# EAGLE board shift-one (EAGLE 5.07)
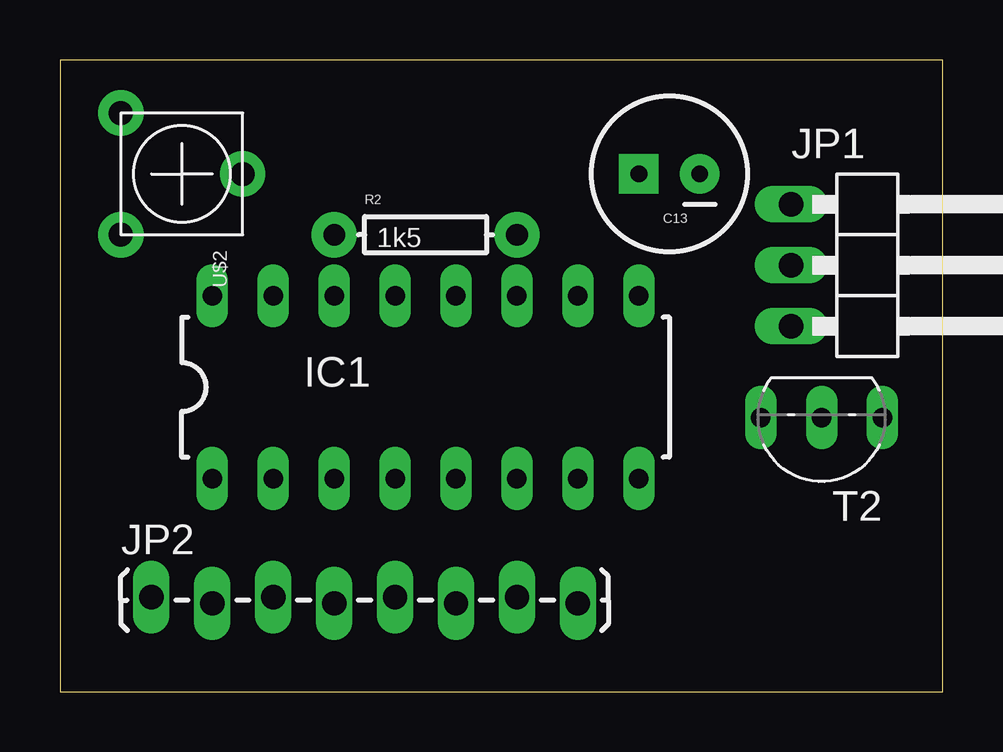
[diagram p0: board, top side]
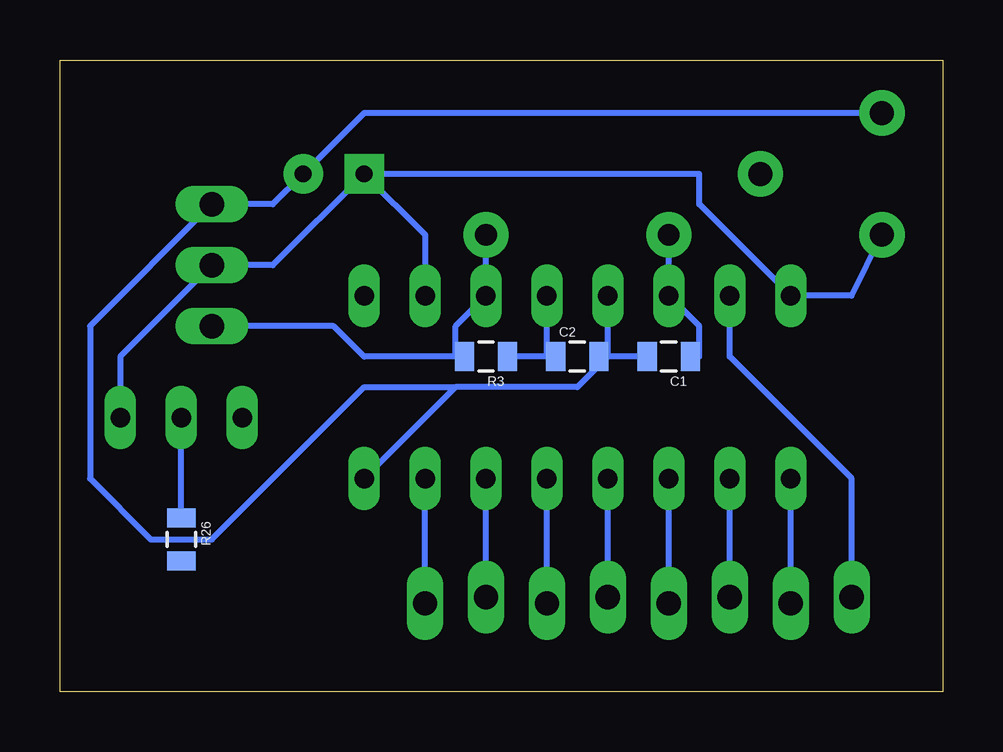
[diagram p1: board, bottom side, seen from below]

Size 36.81 x 26.34 mm. Coordinates in mm from the lower left corner, seen from the top.
Outline: 0,0 36.81,0 36.81,26.34 0,26.34 0,0
Copper layers (1*16): Top 0.035mm / dielectric 1.5mm / Bottom 0.035mm
Design rules "default": minimum track width 10mil, minimum drill 24mil, track to track 8mil, track to pad 8mil, pad to pad 8mil, via to via 8mil, smd to smd 8mil, copper to edge 40mil, drill to drill 8mil, minimum pad ring 10mil, minimum via ring 8mil, stop-mask expansion 4mil, vias tented up to drill 0mil, thermal gap 10mil

## Footprints (pad centres in the part's own frame; a part is rotated, then mirrored left to right if it is on the bottom)
0805 = smd 0.8 x 1.2: 1 -0.9,0; 2 0.9,0
CPOL-RADIAL-100UF-25V = drill 0.7 pad 1.651 square: 1 1.27,0 | drill 0.7 pad 1.651 round: 2 -1.27,0
DIL16 = drill 0.813 long: 1 -8.89,-3.81; 2 -6.35,-3.81; 3 -3.81,-3.81; 4 -1.27,-3.81; 5 1.27,-3.81; 6 3.81,-3.81; 7 6.35,-3.81; 8 8.89,-3.81; 9 8.89,3.81; 10 6.35,3.81; 11 3.81,3.81; 12 1.27,3.81; 13 -1.27,3.81; 14 -3.81,3.81; 15 -6.35,3.81; 16 -8.89,3.81
1X03/90 = drill 1.016 long: 1 -2.54,-3.81; 2 0,-3.81; 3 2.54,-3.81
1X08_LOCK_LONGPADS = drill 1.016 long: 1 0,0.127; 2 2.54,-0.127; 3 5.08,0.127; 4 7.62,-0.127; 5 10.16,0.127; 6 12.7,-0.127; 7 15.24,0.127; 8 17.78,-0.127
AXIAL-0.3 = drill 0.9 pad 1.88 round: P$1 -3.81,0; P$2 3.81,0
TO92-EBC = drill 0.813 long: B 0,-1.27; C 2.54,-1.27; E -2.54,-1.27
TRIM_POT_PTH = drill 1 pad 1.88 round: 1 -2.54,-2.54; 2 0,2.54; 3 2.54,-2.54

## Placement (x,y rotation side)
C1  222  [0805]  11.43,13.97 180 bottom
C2  222  [0805]  15.24,13.97 0 bottom
C13  10u  [CPOL-RADIAL-100UF-25V]  25.4,21.59 180 top
IC1  74LS595N  [DIL16]  15.24,12.7 0 top
JP1  [1X03/90]  34.29,17.78 270 top
JP2  [1X08_LOCK_LONGPADS]  3.81,3.81 0 top
R2  1k5  [AXIAL-0.3]  15.24,19.05 0 top
R3  33k  [0805]  19.05,13.97 180 bottom
R26  1k  [0805]  31.75,6.35 270 bottom
T2  8550  [TO92-EBC]  31.75,10.16 180 top
U$2  10k  [TRIM_POT_PTH]  5.08,21.59 270 top

## Library data of the parts
C1 C2 R2 R3 R26 T2 = digital-toy
C13 IC1 JP2 U$2 = SparkFun
JP1 = pinhead

## Nets
GND: C1.2 C2.2 C13.2 IC1.8 IC1.13 JP1.1 U$2.1
N$1: IC1.15 JP2.1
N$2: IC1.1 JP2.2
N$3: IC1.2 JP2.3
N$4: IC1.3 JP2.4
N$5: IC1.4 JP2.5
N$6: IC1.5 JP2.6
N$7: IC1.6 JP2.7
N$8: IC1.7 JP2.8
N$9: IC1.11 JP1.3 R2.P$2 R3.2
N$10: C2.1 IC1.12 R3.1
N$11: C1.1 IC1.14 R2.P$1
N$55: R26.1 T2.B
VCC: C13.1 IC1.10 IC1.16 JP1.2 T2.E U$2.3

## Tracks (layer width: path | path; a pad name or v marks a point on that pad's centre or on a via)
GND
  Bottom 0.254: C1.2 13.97,13.97 | 13.97,13.97 IC1.13 | 20.32,12.7 IC1.8 | 20.32,12.7 15.24,12.7 13.97,13.97 | 13.97,13.97 C2.2 | U$2.1 24.13,24.13 C13.2 27.94,20.32 JP1.1 35.56,15.24 35.56,8.89 33.02,6.35 30.48,6.35 24.13,12.7 20.32,12.7
N$1
  Bottom 0.254: IC1.15 8.89,13.97 3.81,8.89 JP2.1
N$2
  Bottom 0.254: JP2.2 IC1.1
N$3
  Bottom 0.254: JP2.3 IC1.2
N$4
  Bottom 0.254: JP2.4 IC1.3
N$5
  Bottom 0.254: JP2.5 IC1.4
N$6
  Bottom 0.254: JP2.6 IC1.5
N$7
  Bottom 0.254: JP2.7 IC1.6
N$8
  Bottom 0.254: JP2.8 IC1.7
N$9
  Bottom 0.254: 20.32,13.97 20.32,15.24 IC1.11 R2.P$2 | JP1.3 25.4,15.24 24.13,13.97 20.32,13.97 | R3.2 20.32,13.97
N$10
  Bottom 0.254: 16.51,13.97 R3.1 | 16.51,13.97 IC1.12 | C2.1 16.51,13.97
N$11
  Bottom 0.254: C1.1 10.16,13.97 10.16,15.24 IC1.14 R2.P$1
N$55
  Bottom 0.254: R26.1 T2.B
VCC
  Bottom 0.254: U$2.3 3.81,16.51 IC1.16 10.16,20.32 10.16,21.59 C13.1 | IC1.10 21.59,19.05 C13.1 | T2.E 34.29,13.97 JP1.2 27.94,17.78 C13.1